# Altium PCB Macropadmod.PcbDoc
Units mm, origin at the board's own origin, x right, y up, seen from the top; angles counter-clockwise.
Board outline 99.61 x 81.21 mm, 2 copper layers (Top Layer, Bottom Layer); 8 components, 11 nets, 82 pads, 0 vias.
Unrouted connection lines stored in the file: 2.
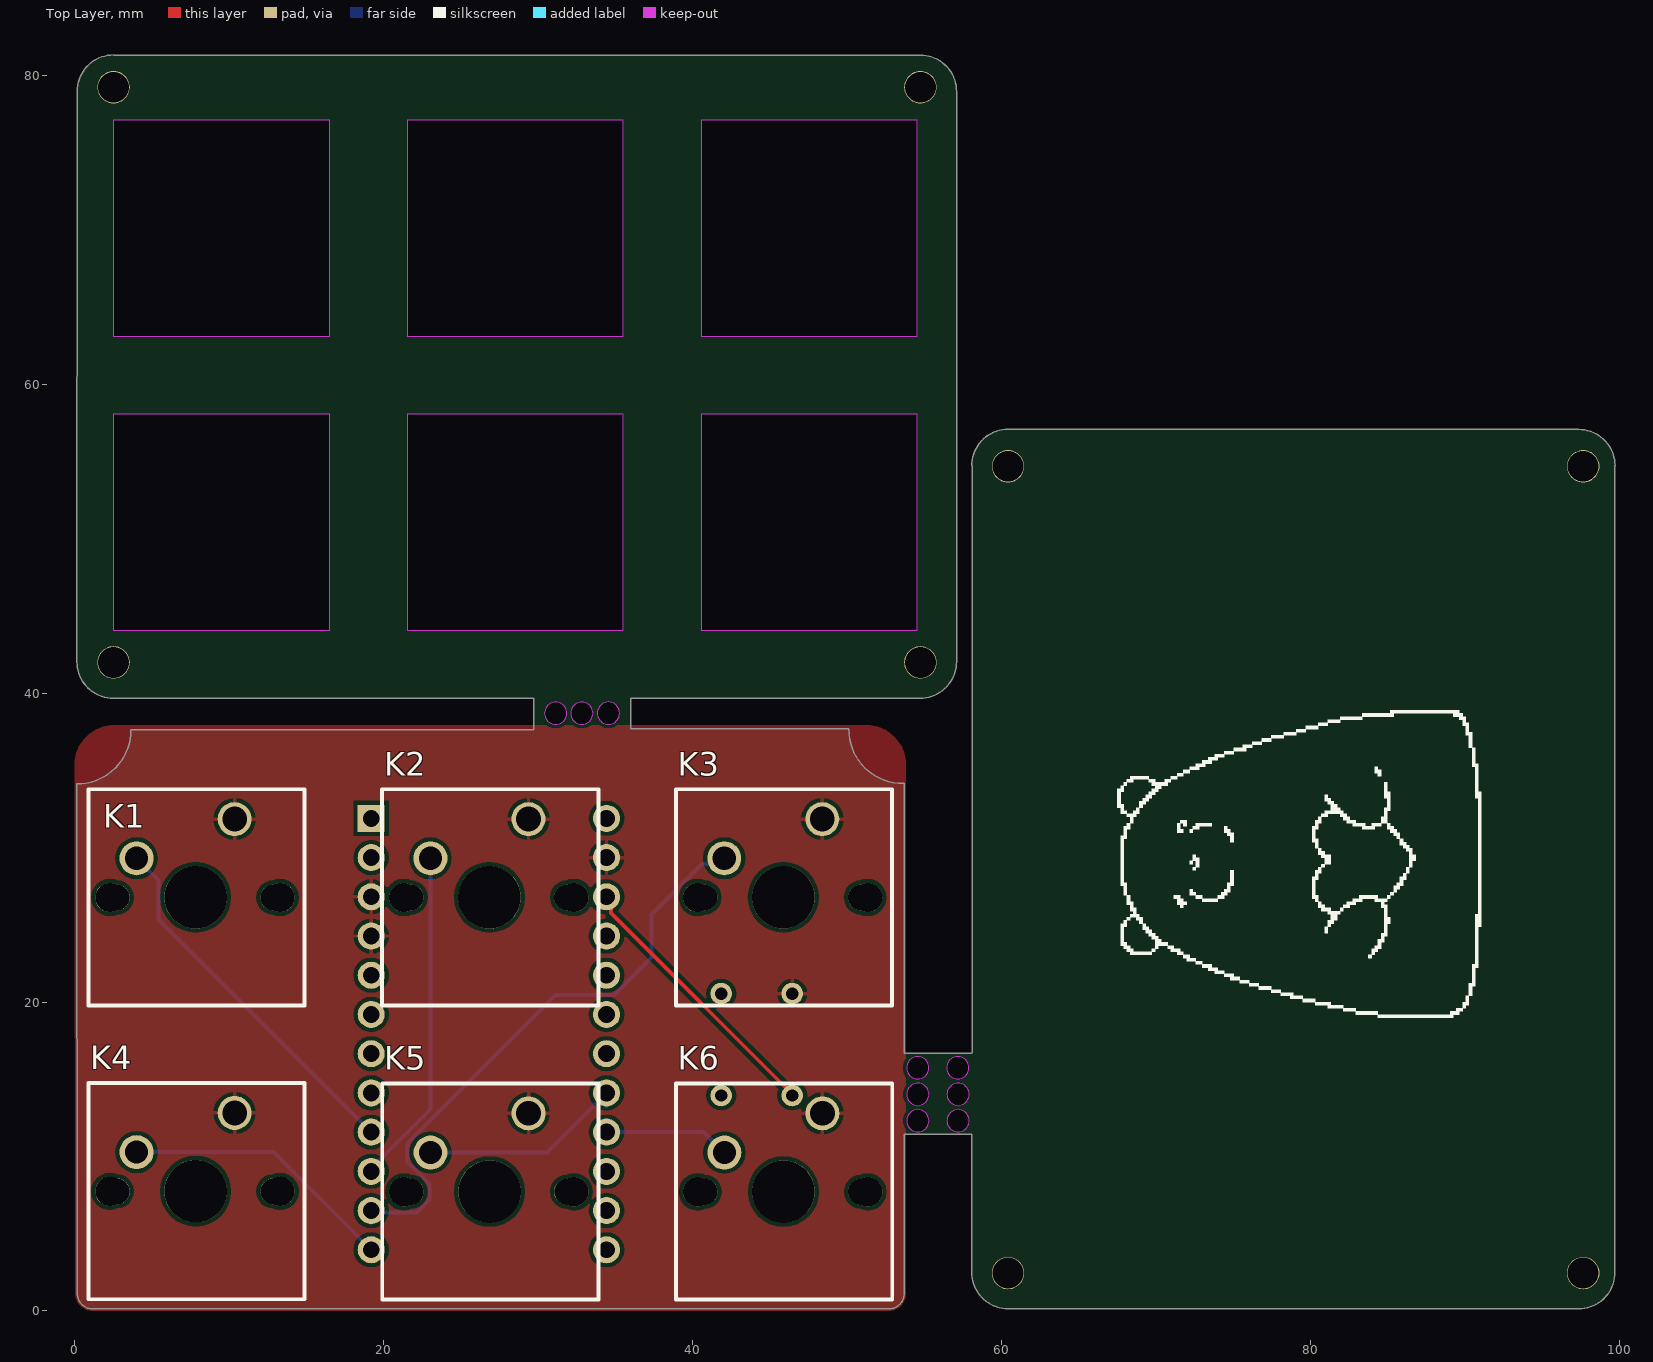
[diagram p0: Top Layer view]
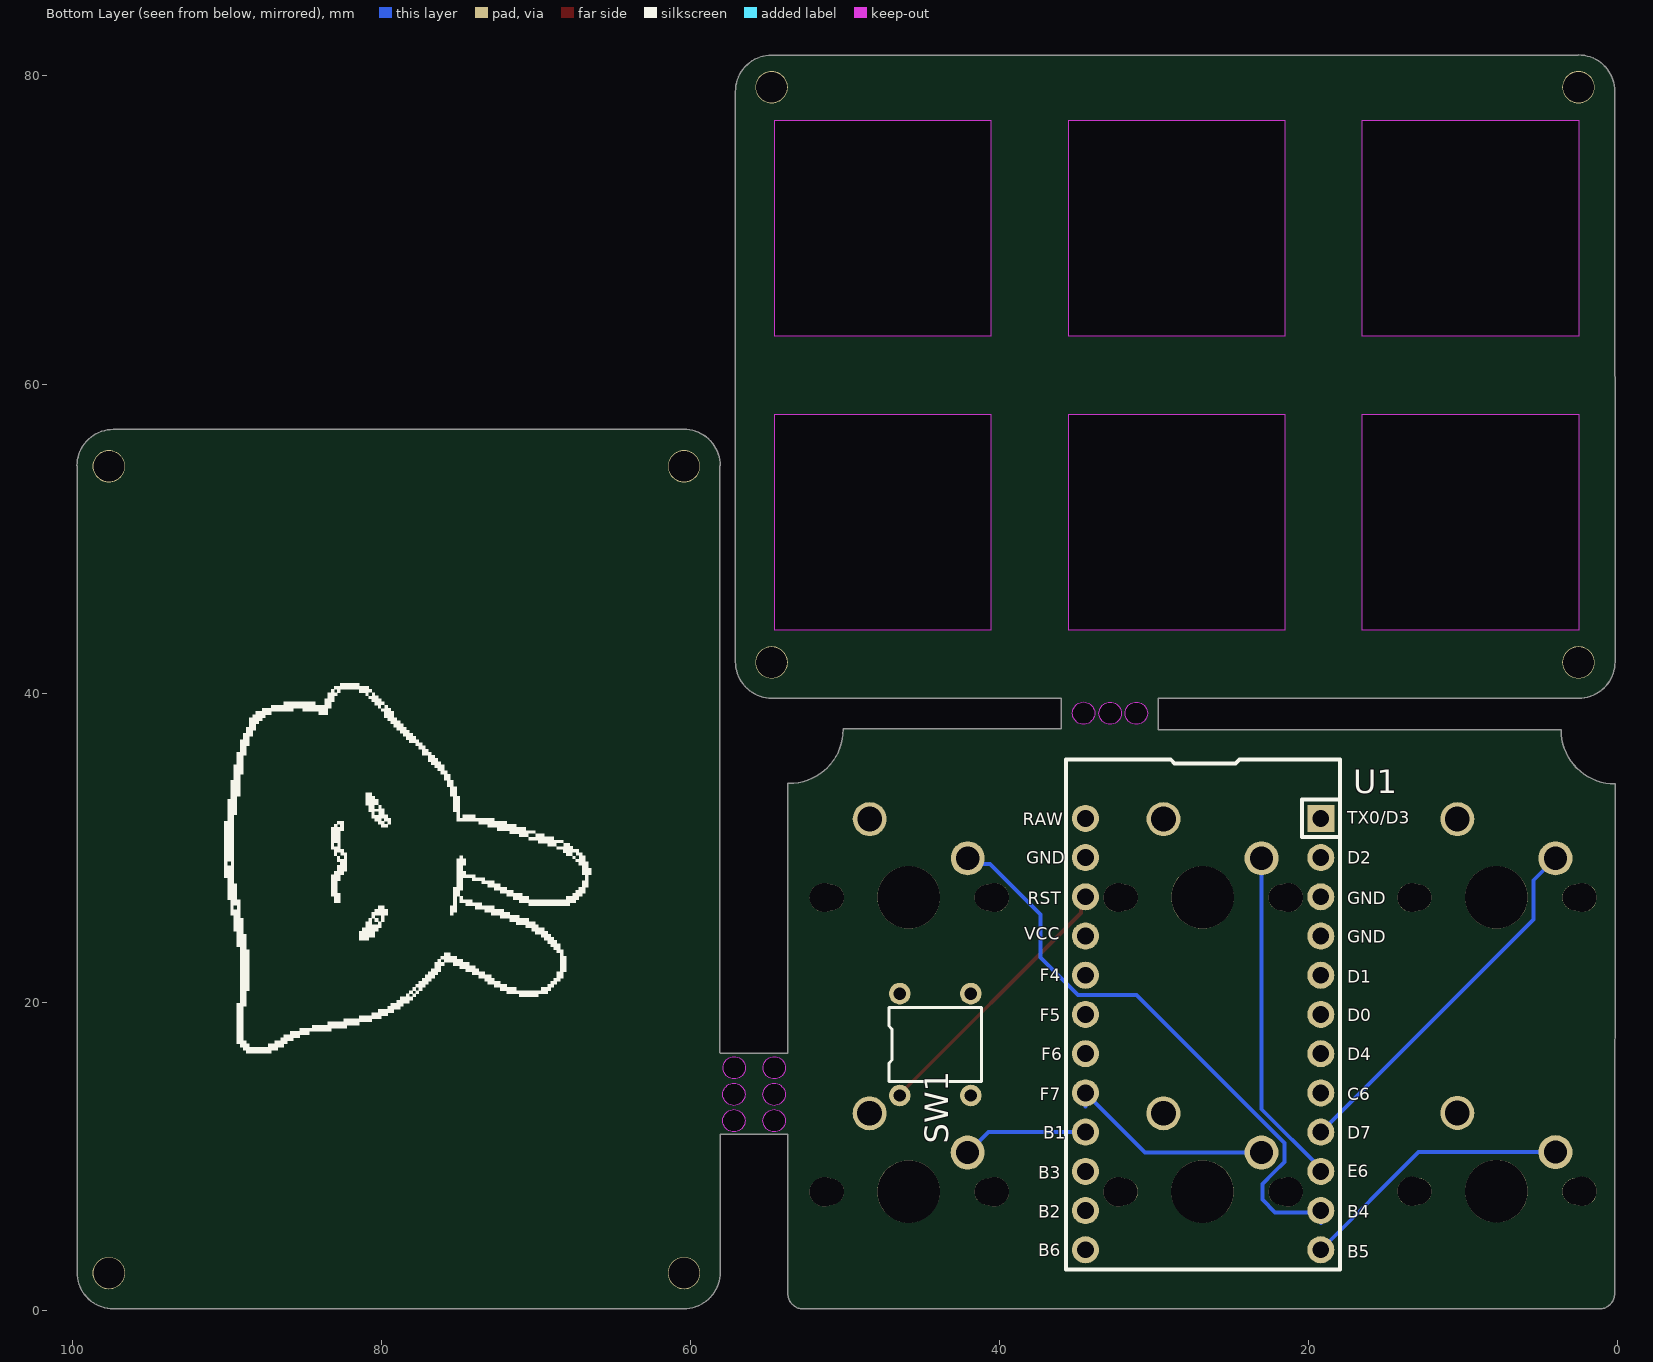
[diagram p1: Bottom Layer view, seen from below]

## Layer stack, top to bottom
Top Solder: solder mask 0.0102, Solder Resist, Dk 3.5
Top Layer: signal copper 0.0356
Dielectric 1: dielectric 0.32, FR-4, Dk 4.8
Bottom Layer: signal copper 0.0356
Bottom Solder: solder mask 0.0102, Solder Resist, Dk 3.5

## Board outline
0.152,1.127 ccw(c1.152,1.127) 1.152,0.127 1.152,0.129 52.702,0.127 ccw(c52.702,1.127) 53.702,1.127 53.7,1.129 53.7,11.429 58.075,11.429 58.075,2.499 58.079,2.499 ccw(c60.445,2.499) 60.445,0.133 60.445,0.132 97.369,0.127 97.369,0.132 ccw(c97.369,2.498) 99.735,2.498 99.727,2.498 99.735,54.727 99.741,54.727 ccw(c97.384,54.727) 97.384,57.085 97.384,57.091 60.44,57.1 60.44,57.102 ccw(c60.44,54.736) 58.074,54.736 58.1,54.736 58.1,16.725 58.075,16.7 53.702,16.7 53.702,34.158 53.615,34.158 cw(c53.615,37.658) 50.115,37.658 50.115,37.7 35.996,37.7 35.996,39.675 54.73,39.675 54.73,39.679 ccw(c54.73,42.045) 57.097,42.045 57.102,42.045 57.102,78.969 57.097,78.969 ccw(c54.731,78.969) 54.731,81.335 54.731,81.327 2.502,81.335 2.502,81.341 ccw(c2.502,78.984) 0.144,78.984 0.139,78.984 0.13,42.04 0.127,42.04 ccw(c2.493,42.04) 2.493,39.674 2.493,39.675 29.706,39.675 29.706,37.634 3.627,37.634 3.627,37.625 cw(c0.127,37.625) 0.127,34.125 0.131,34.125
cut-out: 55.298,15.745 ccw(c54.577,15.745) 54.577,16.466 ccw(c54.577,15.745) 53.856,15.745 ccw(c54.577,15.745) 54.577,15.024 ccw(c54.577,15.745)
cut-out: 55.312,14.024 ccw(c54.591,14.024) 54.591,14.745 ccw(c54.591,14.024) 53.87,14.024 ccw(c54.591,14.024) 54.591,13.303 ccw(c54.591,14.024)
cut-out: 55.312,12.324 ccw(c54.591,12.324) 54.591,13.045 ccw(c54.591,12.324) 53.87,12.324 ccw(c54.591,12.324) 54.591,11.603 ccw(c54.591,12.324)
cut-out: 57.912,12.324 ccw(c57.191,12.324) 57.191,13.045 ccw(c57.191,12.324) 56.47,12.324 ccw(c57.191,12.324) 57.191,11.603 ccw(c57.191,12.324)
cut-out: 57.912,14.024 ccw(c57.191,14.024) 57.191,14.745 ccw(c57.191,14.024) 56.47,14.024 ccw(c57.191,14.024) 57.191,13.303 ccw(c57.191,14.024)
cut-out: 57.898,15.745 ccw(c57.177,15.745) 57.177,16.466 ccw(c57.177,15.745) 56.456,15.745 ccw(c57.177,15.745) 57.177,15.024 ccw(c57.177,15.745)
cut-out: 31.129,37.979 ccw(c31.129,38.7) 31.85,38.7 ccw(c31.129,38.7) 31.129,39.422 ccw(c31.129,38.7) 30.408,38.7 ccw(c31.129,38.7)
cut-out: 32.829,37.979 ccw(c32.829,38.7) 33.55,38.7 ccw(c32.829,38.7) 32.829,39.422 ccw(c32.829,38.7) 32.108,38.7 ccw(c32.829,38.7)
cut-out: 34.55,37.994 ccw(c34.55,38.715) 35.272,38.715 ccw(c34.55,38.715) 34.55,39.436 ccw(c34.55,38.715) 33.829,38.715 ccw(c34.55,38.715)
cut-out: 2.493,44.081 16.493,44.081 16.493,58.081 2.493,58.081
cut-out: 40.553,44.081 54.553,44.081 54.553,58.081 40.553,58.081
cut-out: 2.493,63.111 16.493,63.111 16.493,77.111 2.493,77.111
cut-out: 40.553,63.111 54.553,63.111 54.553,77.111 40.553,77.111
cut-out: 21.523,44.081 35.523,44.081 35.523,58.081 21.523,58.081
cut-out: 21.523,63.111 35.523,63.111 35.523,77.111 21.523,77.111

## Design rules (kind name [scope] priority, off if disabled: settings)
Clearance [All] p1: gap=0.254 ignorepadtopadclearanceinfootprint=FALSE except(0: Arc-Hole Track-Hole SMDPad-Hole THPad-Hole Via-Hole Fill-Hole Poly-Hole Region-Hole Text-Hole)
PolygonConnect [All] p1: connectstyle=Relief reliefconductorwidth=0.254 reliefentries=4 polygonreliefangle="90 Angle" airgapwidth=0.254
RoutingVias [All] p1: holewidth=0.711 width=1.27 viastyle="Through Hole" minholewidth=0.711 minwidth=1.27 maxholewidth=0.711 maxwidth=1.27
SolderMaskExpansion [All] p1: expansion=0.102 istentingtop=FALSE
Width [All] p1: maxlimit=0.254 minlimit=0.254 preferedwidth=0.254
30 further rules are at their usual default settings.

## Components (designator, comment, footprint, x,y, rotation, side; value= is the part's Value field where it differs from the comment)
K1 "KEYSW-canadian_parts" SOCKET 0.815,19.787 r0 top
K2 "KEYSW-canadian_parts" SOCKET 19.845,19.787 r0 top
K3 "KEYSW-canadian_parts" SOCKET 38.875,19.787 r0 top
K4 "KEYSW-canadian_parts" SOCKET 0.815,0.757 r0 top
K5 "KEYSW-canadian_parts" SOCKET 19.851,0.731 r0 top
K6 "KEYSW-canadian_parts" SOCKET 38.881,0.731 r0 top
SW1 "SW_Push" RESET 40.752,15.45 r0 bottom
U1 "ProMicro-keebio" PRO-MICRO 34.425,31.9 r180 bottom

## Footprints (in the part's own frame and the unit in brackets; to place one, negate y for a bottom-side part, rotate by r counter-clockwise, add the part's x,y. Pads: shape width x height; smd on the part's side, far side on the other; paste and mask are expansions set on the pad)
PRO-MICRO [mm]
  rect 1.753x1.753 hole 1.092: 1(15.24,0)
  round 1.753 hole 1.092: 2(15.24,-2.54) 3(15.24,-5.08) 4(15.24,-7.62) 5(15.24,-10.16) 6(15.24,-12.7) 7(15.24,-15.24) 8(15.24,-17.78) 9(15.24,-20.32) 10(15.24,-22.86) 11(15.24,-25.4) 12(15.24,-27.94) 13(0,-27.94) 14(0,-25.4) 15(0,-22.86) 16(0,-20.32) 17(0,-17.78) 18(0,-15.24) 19(0,-12.7) 20(0,-10.16) 21(0,-7.62) 22(0,-5.08) 23(0,-2.54) 24(0,0)
  silkscreen extent -1.27,-29.21 16.48,3.81
RESET [mm]
  round 1.4 hole 0.8: 1(5.7,1.5) 2(5.7,-5.1) 3(1.1,1.5) 4(1.1,-5.1)
  silkscreen extent 0.4,-4.2 6.4,0.6
SOCKET [mm]
  round 2.2 hole 1.5: 1(3.175,9.525)
  round 2.2 hole 1.6: 2(9.525,12.065)
  round 1.9 hole 1.9: 3(1.45,6.985) 3(12.46,6.985)
  round 1.7 hole 1.7: 3(1.88,6.985) 3(12.04,6.985)
  round 4.05 hole 4.05: 3(7,7)
  silkscreen extent 0.05,0 14.05,14

## Free pads (board coordinates)
  round 2.1 hole 2: 3(2.5,42) 3(2.5,79.25) 3(54.75,42) 3(54.75,79.25) 3(54.75,79.25) 3(54.75,79.25) 3(60.425,2.45) 3(60.425,54.7) 3(97.675,2.45) 3(97.675,2.45) 3(97.675,2.45) 3(97.675,54.7)

## Nets (pads, with @x,y where several pads share a name; then routed paths per layer and width w, separated by ;. In a path a pad name is that pad's centre, name@x,y a point inside that pad or via, vN(x,y) a via of type N, cw(c..) or ccw(c..) an arc to the next point about the centre after c; other vN are vias at no path point)
GND: K1.2 K2.2 K3.2 K4.2 K5.2 K6.2 SW1.2 U1.3 U1.4 U1.23
NetK1_1: K1.1 U1.9 | length 24
  Bottom Layer w0.254: K1.1 5.409,27.893 5.409,25.356 U1.9
NetK2_1: K2.1 U1.10 | length 21.9
  Bottom Layer w0.254: U1.10 19.185,9.228 23.02,13.063 K2.1
NetK3_1: K3.1 U1.11 | length 38.2
  Bottom Layer w0.254: U1.11 19.3,6.385 22.141,6.385 22.962,7.206 22.962,8.226 22.241,8.947 21.545,9.643 21.545,10.869 31.133,20.458 34.921,20.458 37.347,22.884 37.347,25.677 40.61,28.94 41.678,28.94 K3.1
NetK4_1: K4.1 U1.12 | length 17.8
  Bottom Layer w0.254: K4.1@3.997,10.289 K4.1 12.863,10.282 U1.12 ; 19.18,5.678 19.187,5.685
NetK5_1: K5.1 U1.17 | length 13
  Bottom Layer w0.254: K5.1 30.561,10.256 U1.17
NetK6_1: K6.1 U1.16 | length 8.3
  Bottom Layer w0.254: U1.16 40.712,11.58 42.036,10.256 K6.1 K6.1@42.056,10.323 ; 34.427,13.238 34.427,13.305
NetK7_1: U1.15
NetK8_1: U1.14
NetK9_1: U1.13
NetSW1_1: SW1.1 U1.22 | length 17.9
  Top Layer w0.254: U1.22 34.712,26.533 34.712,25.772 46.452,14.031 SW1.1
pads on no net: K1.3 K2.3 K3.3 K4.3 K5.3 K6.3 SW1.3 SW1.4 U1.1 U1.2 U1.5 U1.6 U1.7 U1.8 U1.18 U1.19 U1.20 U1.21 U1.24

## Polygon pours and split planes (outlines as drawn)
GND on Top Layer "GND_L01_P021" (solid, pour order 21): 0,34.25 0,35.385 cw(c2.54,35.385) 2.54,37.925 51.26,37.925 cw(c51.26,35.385) 53.8,35.385 53.8,1.1 cw(c52.7,1.1) 52.7,0 1.175,0 cw(c1.175,1.15) 0.025,1.15
no net on Top Layer "NONET_L01_P020" (solid, pour order 20): 0,37.9
no net on Top Layer "NONET_L01_P012" (solid, pour order 12): 76.5,122.127
no net on Top Layer "NONET_L01_P007" (solid, pour order 7): 14.527,-11.873
no net on Bottom Layer "NONET_L02_P019" (solid, pour order 19): 36.875,37.7
no net on Bottom Layer "NONET_L02_P018" (solid, pour order 18): 36.875,37.7
no net on Bottom Layer "NONET_L02_P017" (solid, pour order 17): 36.875,37.7
no net on Bottom Layer "NONET_L02_P015" (solid, pour order 15): 0,37.8
no net on Bottom Layer "NONET_L02_P014" (solid, pour order 14): 0,37.8
no net on Bottom Layer "NONET_L02_P013" (solid, pour order 13): 0,37.8

## Other copper
Top Layer:
  region: 146.878,207.896

## Silkscreen, mask and mechanical layers (free items; w line width, h text height)
Top Overlay:
  drawing of 31 lines, arcs and shapes, not listed
Bottom Overlay:
  drawing of 8 lines, arcs and shapes, not listed
Mechanical 1:
  lines w0.25: 29.706,37.8 29.706,39.675 ; 35.996,37.8 49.45,37.8 50.1,37.8 50.115,37.785 ; 35.996,37.821 35.996,39.675 54.73,39.675 ; 50.108,37.665 50.108,37.792 ; 53.7,1.129 53.7,11.429 58.075,11.429 ; 53.7,16.7 58.075,16.7 ; 58.1,2.47 58.1,11.429
  lines w0.254: 0.127,34.125 ccw(c0.127,37.625) 3.627,37.625 ; 0.127,42.04 ccw(c2.493,42.04) 2.493,39.674 ; 0.13,42.04 0.139,78.984 ; 0.131,34.125 0.154,1.127 ; 0.144,78.984 cw(c2.502,78.984) 2.502,81.341 ; 0.152,1.127 ccw(c1.152,1.127) 1.152,0.127 ; 1.152,0.129 52.702,0.127 ccw(c52.702,1.127) 53.702,1.127 ; 2.493,39.675 29.706,39.675 ; 2.502,81.335 54.731,81.327 ; 3.627,37.634 3.793,37.8 29.706,37.8 ; 50.115,37.658 ccw(c53.615,37.658) 53.615,34.158 ; 53.702,16.7 53.702,34.158 ; 54.73,39.679 ccw(c54.73,42.045) 57.097,42.045 ; 54.731,81.335 cw(c54.731,78.969) 57.097,78.969 ; 57.102,42.045 57.102,78.969 ; 58.099,54.707 cw(c60.465,54.707) 60.465,57.073 ; 58.1,16.7 58.1,54.707 ; 58.104,2.47 ccw(c60.47,2.47) 60.47,0.103 ; 60.465,57.07 97.409,57.061 ; 60.47,0.098 97.394,0.098 ; 97.394,0.103 ccw(c97.394,2.469) 99.76,2.469 ; 97.409,57.056 cw(c97.409,54.698) 99.766,54.698 ; 99.752,2.469 99.76,54.698

## Text inside footprints (layer, text, board x,y; h text height)
U1: Bottom Overlay "B5" at 17.475,3.45 h0.8; Bottom Overlay "B4" at 17.475,6.05 h0.8; Bottom Overlay "E6" at 17.475,8.65 h0.8; Bottom Overlay "TX0/D3" at 17.475,31.564 h0.8; Bottom Overlay "D7" at 17.475,11.15 h0.8; Bottom Overlay "C6" at 17.475,13.65 h0.8; Bottom Overlay "D4" at 17.475,16.25 h0.8; Bottom Overlay "D0" at 17.475,18.75 h0.8; Bottom Overlay "D1" at 17.475,21.25 h0.8; Bottom Overlay "GND" at 17.475,23.85 h0.8; Bottom Overlay "D2" at 17.475,28.95 h0.8; Bottom Overlay "B6" at 37.475,3.55 h0.8; Bottom Overlay "B2" at 37.475,6.05 h0.8; Bottom Overlay "B3" at 37.475,8.55 h0.8; Bottom Overlay "B1" at 37.175,11.15 h0.8; Bottom Overlay "F7" at 37.375,13.65 h0.8; Bottom Overlay "F5" at 37.375,18.75 h0.8; Bottom Overlay "F4" at 37.375,21.35 h0.8; Bottom Overlay "VCC" at 38.375,24.05 h0.8; Bottom Overlay "RST" at 38.175,26.35 h0.8; Bottom Overlay "GND" at 38.275,28.95 h0.8; Bottom Overlay "RAW" at 38.475,31.45 h0.8; Bottom Overlay "GND" at 17.475,26.35 h0.8; Bottom Overlay "F6" at 37.275,16.25 h0.8